# Altium PCB science_board_2019.PcbDoc
Units mm, origin at the board's own origin, x right, y up, seen from the top; angles counter-clockwise.
Board outline 88 x 100 mm, 2 copper layers (Top Layer, Bottom Layer); 100 components, 57 nets, 316 pads, 0 vias.
Unrouted connection lines stored in the file: 175.
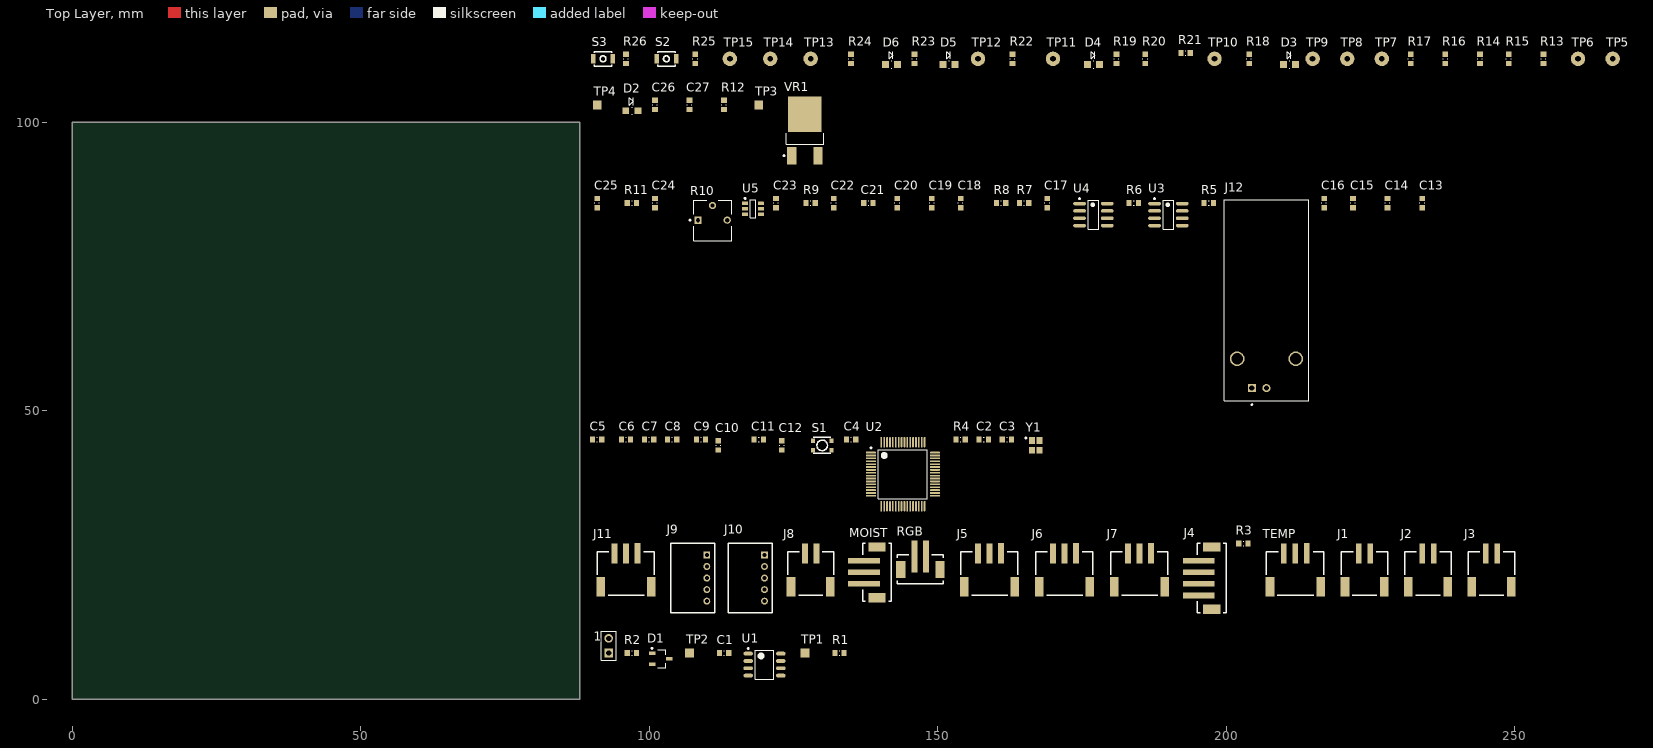
[diagram p0: Top Layer view]
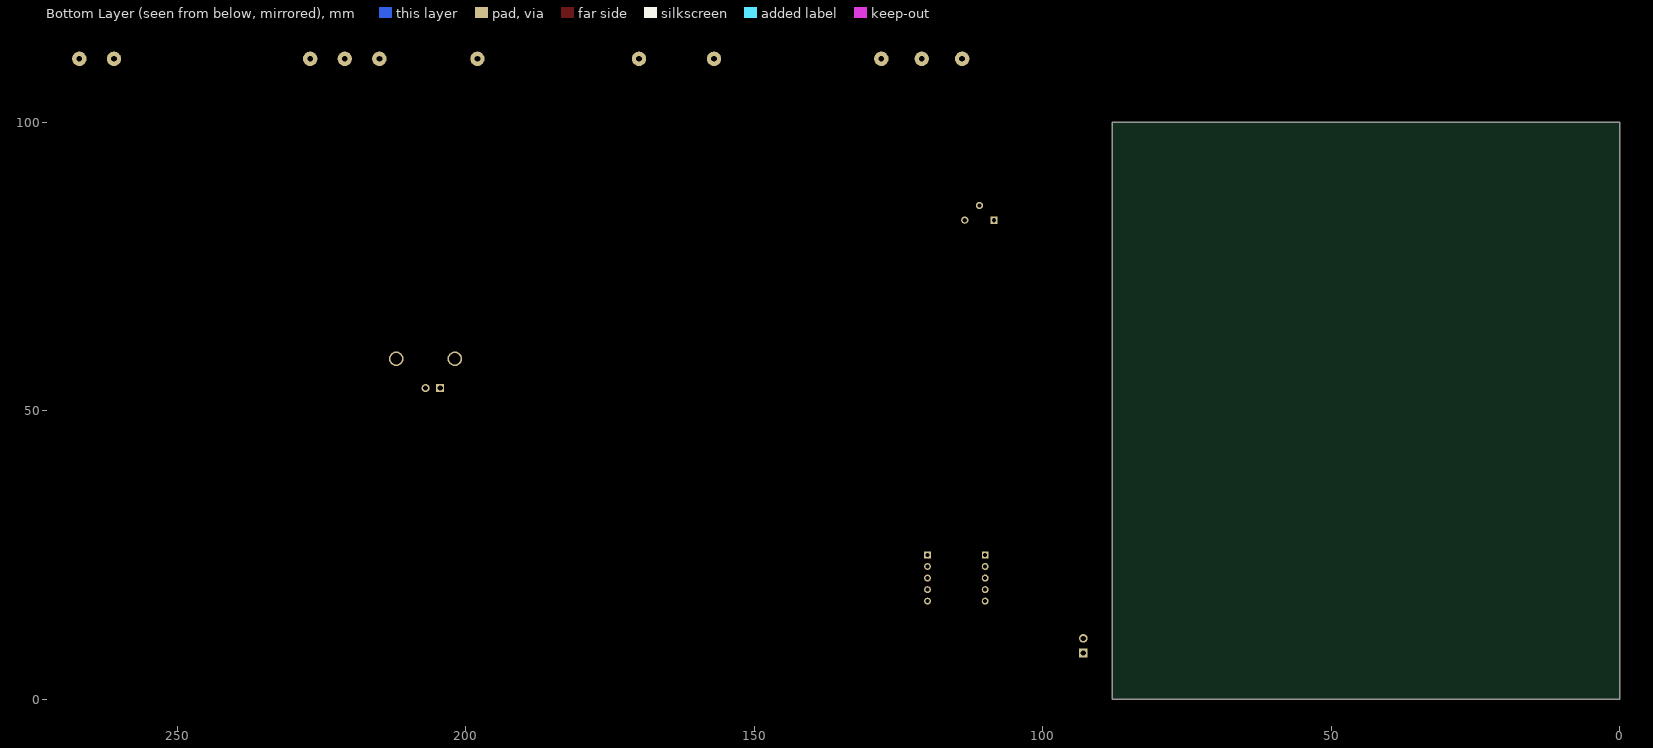
[diagram p1: Bottom Layer view, seen from below]

## Layer stack, top to bottom
Top Solder: solder mask 0.0102, Solder Resist, Dk 3.5
Top Layer: signal copper 0.0356
Dielectric 1: dielectric 0.32, FR-4, Dk 4.8
Bottom Layer: signal copper 0.0356
Bottom Solder: solder mask 0.0102, Solder Resist, Dk 3.5

## Board outline
0,0 0,100 88,100 88,0

## Design rules (kind name [scope] priority, off if disabled: settings)
Clearance [All] p1: gap=0.254 ignorepadtopadclearanceinfootprint=FALSE except(0: Arc-Hole Track-Hole SMDPad-Hole THPad-Hole Via-Hole Fill-Hole Poly-Hole Region-Hole Text-Hole)
PolygonConnect [All] p1: connectstyle=Relief reliefconductorwidth=0.254 reliefentries=4 polygonreliefangle="90 Angle" airgapwidth=0.254
RoomDefinition support [InComponentClass('support')] p1: confinementstyle=ConfineIn formatcopy=TRUE lockcomponents=FALSE outline 89,109 271,109 271,116 89,116
RoomDefinition power [InComponentClass('power')] p2: confinementstyle=ConfineIn formatcopy=TRUE lockcomponents=FALSE outline 90,92 131,92 131,108 90,108
RoomDefinition ph [InComponentClass('ph')] p3: confinementstyle=ConfineIn formatcopy=TRUE lockcomponents=FALSE outline 90,50 238,50 238,91 90,91
RoomDefinition mcu [InComponentClass('mcu')] p4: confinementstyle=ConfineIn formatcopy=TRUE lockcomponents=FALSE outline 89,32 169,32 169,49 89,49
RoomDefinition connectors [InComponentClass('connectors')] p5: confinementstyle=ConfineIn formatcopy=TRUE lockcomponents=FALSE outline 89,14 252,14 252,31 89,31
RoomDefinition can [InComponentClass('can')] p6: confinementstyle=ConfineIn formatcopy=TRUE lockcomponents=FALSE outline 89,2 135,2 135,13 89,13
RoutingVias [All] p1: holewidth=0.711 width=1.27 viastyle="Through Hole" minholewidth=0.711 minwidth=1.27 maxholewidth=0.711 maxwidth=1.27
SolderMaskExpansion [All] p1: expansion=0.102
Width [All] p1: maxlimit=0.254 minlimit=0.254 preferedwidth=0.254
30 further rules are at their usual default settings.

## Classes and differential pairs
component class support: D3 D4 D5 D6 R13 R14 R15 R16 R17 R18 R19 R20 R21 R22 R23 R24 R25 R26 S2 S3 TP5 TP6 TP7 TP8 TP9 TP10 TP11 TP12 TP13 TP14 TP15
component class power: C26 C27 D2 R12 TP3 TP4 VR1
component class ph: C13 C14 C15 C16 C17 C18 C19 C20 C21 C22 C23 C24 C25 J12 R5 R6 R7 R8 R9 R10 R11 U3 U4 U5
component class mcu: C2 C3 C4 C5 C6 C7 C8 C9 C10 C11 C12 R4 S1 U2 Y1
component class connectors: J1 J2 J3 J4 J5 J6 J7 J8 J9 J10 J11 MOIST R3 RGB TEMP
component class can: 1 C1 D1 R1 R2 TP1 TP2 U1

## Components (designator, comment, footprint, x,y, rotation, side; value= is the part's Value field where it differs from the comment)
1 "Header 2" HDR1X2 93,8 r90 top
C1 "CAP_0.1uF_16V_0603" CAPC0603(1608)55_N 113,8 r0 top value=0.1uF
C2 "CAP_15pF_0603" CAPC0603(1608)55_N 158,45 r0 top value=15pF
C3 "CAP_15pF_0603" CAPC0603(1608)55_N 162,45 r0 top value=15pF
C4 "CAP_0.1uF_16V_0603" CAPC0603(1608)55_N 135,45 r0 top value=0.1uF
C5 "CAP_0.1uF_16V_0603" CAPC0603(1608)55_N 91,45 r0 top value=0.1uF
C6 "CAP_0.1uF_16V_0603" CAPC0603(1608)55_N 96,45 r0 top value=0.1uF
C7 "CAP_0.1uF_16V_0603" CAPC0603(1608)55_N 100,45 r0 top value=0.1uF
C8 "CAP_4.7uF_0603" CAPC0603(1608)55_N 104,45 r0 top value=4.7uF
C9 "CAP_0.1uF_16V_0603" CAPC0603(1608)55_N 109,45 r0 top value=0.1uF
C10 "CAP_4.7uF_0603" CAPC0603(1608)55_N 112,44 r90 top value=4.7uF
C11 "CAP_10nF_0603" CAPC0603(1608)55_N 119,45 r0 top value=10nF
C12 "CAP_1uF_16V_0603" CAPC0603(1608)55_N 123,44 r90 top value=1uF
C13 "CAP_10uF_0603_POL" CAPC0603(1608)55_N 234,86 r90 top value=10uF
C14 "CAP_0.1uF_50V_0603" CAPC0603(1608)55_N 228,86 r90 top value=0.1uF
C15 "CAP_10uF_0603_POL" CAPC0603(1608)55_N 222,86 r90 top value=10uF
C16 "CAP_0.1uF_50V_0603" CAPC0603(1608)55_N 217,86 r90 top value=0.1uF
C17 "CAP_2.2nF_0603" CAPC0603(1608)55_N 169,86 r90 top value=2.2nF
C18 "CAP_0.1uF_50V_0603" CAPC0603(1608)55_N 154,86 r90 top value=0.1uF
C19 "CAP_10uF_0603_POL" CAPC0603(1608)55_N 149,86 r90 top value=10uF
C20 "CAP_1uF_16V_0603" CAPC0603(1608)55_N 143,86 r90 top value=1uF
C21 "CAP_10uF_0603_POL" CAPC0603(1608)55_N 138,86 r0 top value=10uF
C22 "CAP_0.1uF_50V_0603" CAPC0603(1608)55_N 132,86 r90 top value=0.1uF
C23 "CAP_1uF_16V_0603" CAPC0603(1608)55_N 122,86 r90 top value=1uF
C24 "CAP_1uF_16V_0603" CAPC0603(1608)55_N 101,86 r90 top value=1uF
C25 "CAP_1uF_16V_0603" CAPC0603(1608)55_N 91,86 r90 top value=1uF
C26 "CAP_0.33uF_16V_0603" CAPC0603(1608)55_N 101,103 r90 top value=0.33uF
C27 "CAP_10uF_0603" CAPC0603(1608)55_N 107,103 r90 top value=10uF
D1 "TVS_DIODE_CAN" TVS_DIODE_CAN 102,7 r0 top
D2 "DIO_LED_R" LED_0805 97,102 r0 top
D3 "DIO_LED_Y" LED_0805 211,110 r0 top
D4 "DIO_LED_G" LED_0805 177,110 r0 top
D5 "DIO_LED_G" LED_0805 152,110 r0 top
D6 "DIO_LED_G" LED_0805 142,110 r0 top
J1 "PH SIDE SMD" JST-S2B-SM4-TB 224,18 r0 top
J2 "PH SIDE SMD" JST-S2B-SM4-TB 235,18 r0 top
J3 "PH SIDE SMD" JST-S2B-SM4-TB 246,18 r0 top
J4 "PH TOP SMD" JST-B4B-SM4-TB 200,21 r90 top
J5 "PH SIDE SMD" JST-S3B-SM4-TB 159,18 r0 top
J6 "PH SIDE SMD" JST-S3B-SM4-TB 172,18 r0 top
J7 "PH SIDE SMD" JST-S3B-SM4-TB 185,18 r0 top
J8 "PH SIDE SMD" JST-S2B-SM4-TB 128,18 r0 top
J9 "PH SIDE TH" JST-S5B-PHSK 110,21 r90 top
J10 "PH SIDE TH" JST-S5B-PHSK 120,21 r90 top
J11 "PH SIDE SMD" JST-S3B-SM4-TB 96,18 r0 top
J12 "CON_BNC" 1-1337543-0 207,59 r0 top
MOIST "PH TOP SMD" JST-B3B-SM4-TB 142,22 r90 top
R1 "RES_0R_0603" RESC0603(1608)_N 133,8 r0 top value=0R
R2 "RES_120R_0603" RESC0603(1608)_N 97,8 r0 top value=120R
R3 "RES_4K7_0603" RESC0603(1608)_N 203,27 r0 top value=4K7
R4 "RES_0R_0603" RESC0603(1608)_N 154,45 r0 top value=0R
R5 "RES_4M7_0603" RESC0603(1608)_N 197,86 r0 top value=4.7M
R6 "RES_30K_0603" RESC0603(1608)_N 184,86 r0 top value=30K
R7 "RES_30K_0603" RESC0603(1608)_N 165,86 r0 top value=30K
R8 "RES_75K_0603" RESC0603(1608)_N 161,86 r0 top value=75K
R9 "RES_2K2_0603" RESC0603(1608)_N 128,86 r0 top value=2K2
R10 "POT_5K" 3362P-1-502LF 111,83 r0 top value=5K
R11 "RES_1K_0603" RESC0603(1608)_N 97,86 r0 top value=1K
R12 "RES_100R_0603" RESC0603(1608)_N 113,103 r90 top value=100R
R13 "RES_10K_0603" RESC0603(1608)_N 255,111 r90 top value=10K
R14 "RES_4K7_0603" RESC0603(1608)_N 244,111 r90 top value=4K7
R15 "RES_4K7_0603" RESC0603(1608)_N 249,111 r90 top value=4K7
R16 "RES_10K_0603" RESC0603(1608)_N 238,111 r90 top value=10K
R17 "RES_10K_0603" RESC0603(1608)_N 232,111 r90 top value=10K
R18 "RES_100R_0603" RESC0603(1608)_N 204,111 r90 top value=100R
R19 "RES_10K_0603" RESC0603(1608)_N 181,111 r90 top value=10K
R20 "RES_10K_0603" RESC0603(1608)_N 186,111 r90 top value=10K
R21 "RES_10K_0603" RESC0603(1608)_N 193,112 r0 top value=10K
R22 "RES_100R_0603" RESC0603(1608)_N 163,111 r90 top value=100R
R23 "RES_100R_0603" RESC0603(1608)_N 146,111 r90 top value=100R
R24 "RES_100R_0603" RESC0603(1608)_N 135,111 r90 top value=100R
R25 "RES_10K_0603" RESC0603(1608)_N 108,111 r90 top value=10K
R26 "RES_10K_0603" RESC0603(1608)_N 96,111 r90 top value=10K
RGB "PH TOP SMD" JST-B2B-SM4-TB 147,20 r0 top
S1 "SW_PWR" PTS830GM140 130,44 r0 top
S2 "SW_TACTILE" B3U-1100P 103,111 r0 top
S3 "SW_TACTILE" B3U-1100P 92,111 r0 top
TEMP "PH SIDE SMD" JST-S3B-SM4-TB 212,18 r0 top
TP1 "TESTPOINT_SMD" TESTPOINT 127,8 r0 top
TP2 "TESTPOINT_SMD" TESTPOINT 107,8 r90 top
TP3 "TESTPOINT_SMD" TESTPOINT 119,103 r90 top
TP4 "TESTPOINT_SMD" TESTPOINT 91,103 r90 top
TP5 "TESTPOINT_LOOP" TESTPOINT_LOOP 267,111 r0 top
TP6 "TESTPOINT_LOOP" TESTPOINT_LOOP 261,111 r0 top
TP7 "TESTPOINT_LOOP" TESTPOINT_LOOP 227,111 r0 top
TP8 "TESTPOINT_LOOP" TESTPOINT_LOOP 221,111 r0 top
TP9 "TESTPOINT_LOOP" TESTPOINT_LOOP 215,111 r0 top
TP10 "TESTPOINT_LOOP" TESTPOINT_LOOP 198,111 r90 top
TP11 "TESTPOINT_LOOP" TESTPOINT_LOOP 170,111 r90 top
TP12 "TESTPOINT_LOOP" TESTPOINT_LOOP 157,111 r90 top
TP13 "TESTPOINT_LOOP" TESTPOINT_LOOP 128,111 r90 top
TP14 "TESTPOINT_LOOP" TESTPOINT_LOOP 121,111 r90 top
TP15 "TESTPOINT_LOOP" TESTPOINT_LOOP 114,111 r90 top
U1 "IC TXRX CAN" LTC2875 120,6 r0 top
U2 "STM32F091RC" STM_LQFP64_N 144,39 r0 top
U3 "CA3140AMZ" CA3140AMZ 190,84 r0 top
U4 "TL081BCDG4" TL081BCDG4 177,84 r0 top
U5 "LM2776" SOT23-6 118,85 r0 top
VR1 "5V0_3V3_LDO" VOLTAGE_REGULATOR 127,97 r0 top
Y1 "CRYSTAL_32MHZ" AVX-CX2520DB32000D0GEJZ1-4_V 167,44 r0 top

## Footprints (in the part's own frame and the unit in brackets; to place one, negate y for a bottom-side part, rotate by r counter-clockwise, add the part's x,y. Pads: shape width x height; smd on the part's side, far side on the other; paste and mask are expansions set on the pad)
1-1337543-0 [mm]
  rect 1.4x1.4 hole 0.89: 1(-2.54,-5.08)
  round 1.4 hole 0.89: 2(0,-5.08)
  round 2.55 hole 2.01: MH1(-5.08,0) MH2(5.08,0)
  silkscreen extent -7.35,-8.07 7.35,27.6, body extent -7.35,-7.1 7.35,28.05, height 15.8
3362P-1-502LF [mm]
  rect 1.25x1.25 hole 0.75: 1(-2.54,0.035)
  round 1.25 hole 0.75: 2(0,2.575) 3(2.54,0.035)
  silkscreen extent -4.02,-3.49 3.3,3.5, body extent -3.3,-3.49 3.3,3.49, height 4.95
AVX-CX2520DB32000D0GEJZ1-4_V [mm] "Hand Drawn, 4-Leads,Body 2.5x2mm"
  rect 1x1.2 smd: 1(-0.65,0.85) 2(-0.65,-0.85) 3(0.65,-0.85) 4(0.65,0.85)
  silkscreen extent -1.82,1.13 -1.58,1.38, body extent -1,-1.25 1,1.25, height 0.55
B3U-1100P [mm] "TACTILE SWITCH GREY"
  rect 0.8x1.7 smd: 1(-1.7,0) 2(1.7,0)
  silkscreen extent -1.5,-1.25 1.5,1.25
CA3140AMZ [mm]
  oval 2.2x0.6 smd: 1(-2.4,1.905) 2(-2.4,0.635) 3(-2.4,-0.635) 4(-2.4,-1.905) 5(2.4,-1.905) 6(2.4,-0.635) 7(2.4,0.635) 8(2.4,1.905)
  silkscreen extent -2.52,-2.5 0.9,2.88, body extent -2,-2.5 2,2.5, height 1.75
CAPC0603(1608)55_N [mm] "Chip Capacitor, Body 1.6x0.8mm, Height 0.55mm, IPC Medium Density"
  rect 0.9x1 smd: 1(-0.8,0) 2(0.8,0)
  silkscreen extent -0.05,-0.4 0.05,0.4, body extent -0.87,-0.48 0.88,0.47, height 0.55
HDR1X2 [mm] "Connector; Header; 2 Position"
  rect 1.5x1.5 hole 0.9: 1(0,0)
  round 1.5 hole 0.9: 2(2.54,0)
  silkscreen extent -1.27,-1.27 3.81,1.27
JST-B2B-SM4-TB [mm]
  rect 1x5.5 smd: 1(-1,4.75) 2(1,4.75)
  rect 1.6x3 smd: 3(-3.4,2.5) 4(3.4,2.5)
  silkscreen extent -4,0 4,5
JST-B3B-SM4-TB [mm]
  rect 1x5.5 smd: 1(-2,4.75) 2(0,4.75) 3(2,4.75)
  rect 1.6x3 smd: 4(-4.4,2.5) 5(4.4,2.5)
  silkscreen extent -5,0 5,5
JST-B4B-SM4-TB [mm]
  rect 1x5.5 smd: 1(-3,4.75) 2(-1,4.75) 3(1,4.75) 4(3,4.75)
  rect 1.6x3 smd: 5(-5.4,2.5) 6(5.4,2.5)
  silkscreen extent -6,0 6,5
JST-S2B-SM4-TB [mm]
  rect 1x3.5 smd: 1(-1,7.25) 2(1,7.25)
  rect 1.5x3.4 smd: 3(-3.4,1.5) 4(3.4,1.5)
  silkscreen extent -4,0 4,7.6
JST-S3B-SM4-TB [mm]
  rect 1x3.5 smd: 1(-2,7.25) 2(0,7.25) 3(2,7.3)
  rect 1.5x3.4 smd: 4(-4.4,1.5) 5(4.4,1.5)
  silkscreen extent -5,0 4.9,7.6
JST-S5B-PHSK [mm]
  rect 1.162x1.162 / inner rect 1.524x1.524 / far side rect 1.162x1.162 hole 0.7: 1(4,0)
  round 1.2 / inner round 1.524 / far side round 1.2 hole 0.7: 2(2,0) 3(0,0) 4(-2,0) 5(-4,0)
  silkscreen extent -6,-1.35 6,6.25
LED_0805 [mm] "SMD, 2-Leads, Body 2x1.25mm"
  rect 1.2x1.2 smd: 1(-1.05,0) 2(1.05,0)
  silkscreen extent -0.41,-0.63 0.23,2.25, body extent -1,-0.63 1,0.63, height 0.8
LTC2875 [mm] "SOIC, 8-Leads, Body 5x4mm, Pitch 1.27mm, IPC Low Density"
  oval 1.65x0.65 smd: 1(-2.825,1.905) 2(-2.825,0.635) 3(-2.825,-0.635) 4(-2.825,-1.905) 5(2.825,-1.905) 6(2.825,-0.635) 7(2.825,0.635) 8(2.825,1.905)
  silkscreen extent -2.95,-2.5 1.6,2.9, body extent -3,-2.5 3,2.5, height 1.75
PTS830GM140 [mm] "PWR TACTILE SWITCH (RED)"
  rect 0.7x0.75 smd: 1(-1.625,0.825) 2(1.625,0.825) 3(-1.625,-0.825) 4(1.625,-0.825)
  silkscreen extent -1.53,-1.4 1.53,1.4
RESC0603(1608)_N [mm] "Chip Resistor, Body 1.6x0.8mm, IPC Medium Density"
  rect 0.9x1 smd: 1(-0.8,0) 2(0.8,0)
  silkscreen extent -0.05,-0.4 0.05,0.4, body extent -0.85,-0.47 0.85,0.47, height 0.6
SOT23-6 [mm] "SOT23, 6-Leads, Body 3.05x1.75mm, Pitch 0.95mm, IPC Medium Density"
  rrect17% 1x0.6 smd: 1(-1.375,0.95) 2(-1.375,0) 3(-1.375,-0.95) 4(1.375,-0.95) 5(1.375,0) 6(1.375,0.95)
  silkscreen extent -1.5,-1.55 0.5,1.92, body extent -1.43,-1.48 1.43,1.49, height 0.9
STM_LQFP64_N [mm] "Thin QFP, 64-Leads, Body 10x10mm, Pitch 0.5mm, IPC Medium Density"
  oval 1.8x0.3 smd mask+0.05: 1(-5.55,3.75) 2(-5.55,3.25) 3(-5.55,2.75) 4(-5.55,2.25) 5(-5.55,1.75) 6(-5.55,1.25) 7(-5.55,0.75) 8(-5.55,0.25) 9(-5.55,-0.25) 10(-5.55,-0.75) 11(-5.55,-1.25) 12(-5.55,-1.75) 13(-5.55,-2.25) 14(-5.55,-2.75) 15(-5.55,-3.25) 16(-5.55,-3.75) 33(5.55,-3.75) 34(5.55,-3.25) 35(5.55,-2.75) 36(5.55,-2.25) 37(5.55,-1.75) 38(5.55,-1.25) 39(5.55,-0.75) 40(5.55,-0.25) 41(5.55,0.25) 42(5.55,0.75) 43(5.55,1.25) 44(5.55,1.75) 45(5.55,2.25) 46(5.55,2.75) 47(5.55,3.25) 48(5.55,3.75)
  oval 0.3x1.8 smd mask+0.05: 17(-3.75,-5.55) 18(-3.25,-5.55) 19(-2.75,-5.55) 20(-2.25,-5.55) 21(-1.75,-5.55) 22(-1.25,-5.55) 23(-0.75,-5.55) 24(-0.25,-5.55) 25(0.25,-5.55) 26(0.75,-5.55) 27(1.25,-5.55) 28(1.75,-5.55) 29(2.25,-5.55) 30(2.75,-5.55) 31(3.25,-5.55) 32(3.75,-5.55) 49(3.75,5.55) 50(3.25,5.55) 51(2.75,5.55) 52(2.25,5.55) 53(1.75,5.55) 54(1.25,5.55) 55(0.75,5.55) 56(0.25,5.55) 57(-0.25,5.55) 58(-0.75,5.55) 59(-1.25,5.55) 60(-1.75,5.55) 61(-2.25,5.55) 62(-2.75,5.55) 63(-3.25,5.55) 64(-3.75,5.55)
  silkscreen extent -5.67,-4.25 4.25,4.7, body extent -5,-5 5,5, height 1.6
TESTPOINT [mil]
  rect 60x60 smd: 1(0,0)
TESTPOINT_LOOP [mm]
  round 2.5 hole 1: 2(0,0)
TL081BCDG4 [mm]
  oval 2.2x0.6 smd: 1(-2.4,1.905) 2(-2.4,0.635) 3(-2.4,-0.635) 4(-2.4,-1.905) 5(2.4,-1.905) 6(2.4,-0.635) 7(2.4,0.635) 8(2.4,1.905)
  silkscreen extent -2.52,-2.5 0.9,2.88, body extent -2,-2.5 2,2.5, height 1.75
TVS_DIODE_CAN [mm] "SOT23, 3-Leads, Body 2.95x2.80mm, Pitch 0.95mm, IPC Low Density"
  rect 1.15x0.65 smd: 1(-1.475,0.95) 2(-1.475,-0.95) 3(1.475,0)
  silkscreen extent -1.6,-1.55 0.9,1.95, body extent -1.5,-1.55 1.5,1.55, height 1.25
VOLTAGE_REGULATOR [mm] "DPAK, 3-Leads, Body 6.095x6.54mm, Pitch 4.57mm"
  rect 1.6x3 smd: 1(-2.285,-2.79) 3(2.285,-2.79)
  rect 5.8x6.2 smd: 2(0,4.39)
  silkscreen extent -3.76,-2.91 3.27,1.14, body extent -3.27,-0.84 3.27,5.25, height 2.38

## Part data
1: "Header, 2-Pin", LatestRevisionDate=17-Jul-2002, LatestRevisionNote="Re-released for DXP Platform.", Publisher="Altium Limited"
C1 C4 C5 C6 C7 C9: "CAP CER 0.1UF 16V X7R 0603", Manufacturer=Yageo, Package="0603 (1608 Metric)", Part Number=CC0603KRX7R7BB104, Temperature Coefficient=X7R, Voltage Rating=16V, Dimensions="0.063\" L x 0.031\" W (1.60mm x 0.80mm)"
C2 C3: "CAP CER 15PF 250V NPO 0603", Manufacturer=Yageo, Package="0603 (1608 Metric)", Part Number=AC0603JRNPOYBN150, Temperature Coefficient=NP0, Voltage Rating=250v, Dimensions="0.063\" L x 0.031\" W (1.60mm x 0.80mm)"
C8 C10: "CAP CER 4.7UF 6.3V X5R 0603", Manufacturer=Yageo, Package="0603 (1608 Metric)", Part Number=CC0603KRX5R5BB475, Temperature Coefficient=X5R, Voltage Rating=6.3V, Dimensions="0.063\" L x 0.031\" W (1.60mm x 0.80mm)"
C11: "CAP CER 10000PF 16V X7R 0603", Manufacturer=Yageo, Package="0603 (1608 Metric)", Part Number=CC0603KRX7R7BB103, Temperature Coefficient=X7R, Voltage Rating=16V, Dimensions="0.063\" L x 0.031\" W (1.60mm x 0.80mm)"
C12 C20 C23 C24 C25: "CAP CER 1UF 16V Y5V 0603", Manufacturer=Yageo, Package="0603 (1608 Metric)", Part Number=CC0603ZRY5V7BB105, Temperature Coefficient=Y5V, Voltage Rating=16V, Dimensions="0.063\" L x 0.031\" W (1.60mm x 0.80mm)"
C13 C15 C19 C21 C27: "CAP CER 10UF 10V X5R 0603", Manufacturer=Yageo, Package="0603 (1608 Metric)", Part Number=CC0603MRX5R6BB106, Temperature Coefficient=X5R, Voltage Rating=10V, Dimensions="0.063\" L x 0.031\" W (1.60mm x 0.80mm)"
C14 C16 C18 C22: "CAP CER 0.1UF 50V X7R 0603", Manufacturer=Yageo, Package="0603 (1608 Metric)", Part Number=GCM188R71H104KA57D, Temperature Coefficient=X7R, Voltage Rating=50V, Dimensions="0.063\" L x 0.031\" W (1.60mm x 0.80mm)"
C17: "CAP CER 2.2NF 25V X7R 0603", Manufacturer=Yageo, Package="0603 (1608 Metric)", Part Number=CC0603KRX7R8BB222, Temperature Coefficient=X7R, Voltage Rating=25V, Dimensions="0.063\" L x 0.031\" W (1.60mm x 0.80mm)"
C26: "CAP CER 0.33UF 16V X7R 0603", Manufacturer="Murata Electronics North America", Package="0603 (1608 Metric)", Part Number=GRM188R71C334KA01D, Temperature Coefficient=X7R, Voltage Rating=16V, Dimensions="0.063\" L x 0.031\" W (1.60mm x 0.80mm)"
D1: "TVS DIODE 24V 41V SOT323-3", Manufacturer="Nexperia USA Inc.", Package="SC-70, SOT-323", Part Number=PESD2CAN,215, ComponentLink1Description=Datasheet, ComponentLink1URL=https://assets.nexperia.com/documents/data-sheet/PESD1CAN-U.pdf
D2: "LED RED DIFFUSED 0805 SMD", Forward Voltage Drop=2V, Manufacturer=OSRAM, Package="0805 (2012 Metric)", Part Number="LS R976-NR-1"
D3: "LED YELLOW DIFFUSED 0805 SMD", Forward Voltage Drop=2.2V, Manufacturer=OSRAM, Package="0805 (2012 Metric)", Part Number="LY R976-PS-36"
D4 D5 D6: "LED GREEN DIFFUSED 0805 SMD", Forward Voltage Drop=2.2V, Manufacturer=OSRAM, Package="0805 (2012 Metric)", Part Number="LG R971-KN-1"
J1 J2 J3 J8: library part CON_2M_PH_SIDE_SMT, "CONN HEADER PH SIDE 2POS 2MM SMD", Manufacturer=JST, Part Number=S2B-PH-SM4-TB, ComponentLink1Description=Datasheet, ComponentLink1URL=http://www.jst-mfg.com/product/pdf/eng/ePH.pdf
J4: library part CON_4M_PH_TOP_SMT, "CONN HEADER PH TOP 4POS 2MM SMD", Manufacturer=JST, Part Number=B4B-PH-SM4-TB, ComponentLink1Description=Datasheet, ComponentLink1URL=http://www.jst-mfg.com/product/pdf/eng/ePH.pdf
J5 J6 J7 J11 TEMP: library part CON_3M_PH_SIDE_SMT, "CONN HEADER PH SIDE 3POS 2MM SMD", Manufacturer=JST, Part Number=B3B-PH-SM4-TB, ComponentLink1Description=Datasheet, ComponentLink1URL=http://www.jst-mfg.com/product/pdf/eng/ePH.pdf
J9 J10: library part CON_5M_PH_SIDE_TH, "CONN HEADER PH SIDE 5POS 2MM", Manufacturer=JST, Part Number=S5B-PH-K-S, ComponentLink1Description=Datasheet, ComponentLink1URL=http://www.jst-mfg.com/product/pdf/eng/ePH.pdf
J12: Manufacturer="TE Connectivity", Part Number (MPN)=1-1337543-0
MOIST: library part CON_3M_PH_TOP_SMT, "CONN HEADER PH TOP 3POS 2MM SMD", Manufacturer=JST, Part Number=B3B-PH-SM4-TB, ComponentLink1Description=Datasheet, ComponentLink1URL=http://www.jst-mfg.com/product/pdf/eng/ePH.pdf
R1 R4: "RES SMD 0 OHM JUMPER 1/10W 0603", Manufacturer=Yageo, Package="0603 (1608 Metric)", Part Number (MPN)=RC0603JR-070RL, Dimensions="0.063\" L x 0.031\" W (1.60mm x 0.80mm)"
R2: "RES SMD 120 OHM 5% 1/10W 0603", Manufacturer=Yageo, Package="0603 (1608 Metric)", Part Number (MPN)=RC0603JR-07120RL, Tolerance=5%, Dimensions="0.063\" L x 0.031\" W (1.60mm x 0.80mm)"
R3 R14 R15: "RES SMD 4.7K OHM 5% 1/10W 0603", Manufacturer=Yageo, Package="0603 (1608 Metric)", Part Number (MPN)=RC0603JR-074K7L, Tolerance=5%, Dimensions="0.063\" L x 0.031\" W (1.60mm x 0.80mm)"
R5: "RES SMD 4.7M OHM 1% 1/10W 0603", Manufacturer=Yageo, Package="0603 (1608 Metric)", Part Number (MPN)=RC0603FR-074M7L, Tolerance=1%, Dimensions="0.063\" L x 0.031\" W (1.60mm x 0.80mm)"
R6 R7: "RES SMD 30K OHM 0.5% 1/10W 0603", Digikey Part Number=311-30KDCT-ND, Manufacturer=Yageo, Package="0603 (1608 Metric)", Part Number (MPN)=RT0603DRD0730KL, Tolerance=0.5%, Dimensions="0.063\" L x 0.031\" W (1.60mm x 0.80mm)"
R8: "RES SMD 75K OHM 0.5% 1/10W 0603", Digikey Part Number=311-75KDCT-ND, Manufacturer=Yageo, Package="0603 (1608 Metric)", Part Number (MPN)=RT0603DRD0775KL, Tolerance=0.5%, Dimensions="0.063\" L x 0.031\" W (1.60mm x 0.80mm)"
R9: "RES SMD 2.2K OHM 1% 1/10W 0603", Manufacturer=Yageo, Package="0603 (1608 Metric)", Part Number (MPN)=RC0603FR-072K2L, Tolerance=1%, Dimensions="0.063\" L x 0.031\" W (1.60mm x 0.80mm)"
R10: "TRIMMER 5K OHM 0.5W PC PIN TOP", Manufacturer="Bourns Inc.", Part Number (MPN)=3362P-1-502LF, Tolerance=10%, Dimensions="0.275\" x 0.260\" Face x 0.185\" H (6.99mm x 6.60mm x 4.70mm)"
R11: "RES SMD 1K OHM 5% 1/10W 0603", Manufacturer=Yageo, Package="0603 (1608 Metric)", Part Number (MPN)=RC0603JR-071KL, Tolerance=5%, Dimensions="0.063\" L x 0.031\" W (1.60mm x 0.80mm)"
R12 R18 R22 R23 R24: "RES SMD 100 OHM 1% 1/10W 0603", Manufacturer=Yageo, Package="0603 (1608 Metric)", Part Number (MPN)=RC0603FR-07100RL, Tolerance=1%, Dimensions="0.063\" L x 0.031\" W (1.60mm x 0.80mm)"
R13 R16 R17 R19 R20 R21 R25 R26: "RES SMD 10K OHM 5% 1/10W 0603", Manufacturer=Yageo, Package="0603 (1608 Metric)", Part Number (MPN)=RC0603JR-0710KL, Tolerance=5%, Dimensions="0.063\" L x 0.031\" W (1.60mm x 0.80mm)"
RGB: library part CON_2M_PH_TOP_SMT, "CONN HEADER PH TOP 2POS 2MM SMD", Manufacturer=JST, Part Number=B2B-PH-SM4-TB, ComponentLink1Description=Datasheet, ComponentLink1URL=http://www.jst-mfg.com/product/pdf/eng/ePH.pdf
S1: "Power Switch (Red)", Part Number="PTS830GM140 SMTR LFS", ComponentLink1Description=Datasheet, ComponentLink1URL=https://www.ckswitches.com/media/1478/pts830.pdf
S2 S3: "Tactile Switch (Grey)", Digikey Part Number=SW1021TR-ND, Manufacturer Part Number=B3U-1100P
U1: library part LTC2875, "IC TXRX CAN 4MBPS 8SO", Manufacturer="Linear Technologies", Package="8-SOIC (0.154\", 3.90mm Width)", Part Number=LTC2875IS8#PBF, ComponentLink1Description=Datasheet, ComponentLink1URL=https://www.analog.com/media/en/technical-documentation/data-sheets/2875f.pdf
U2: Manufacturer=STMicroelectronics, Package=64-LQFP, ComponentLink1Description=Datasheet, ComponentLink1URL=https://www.st.com/content/ccc/resource/technical/document/datasheet/95/3c/2e/5b/21/09/45/a6/DM00115237.pdf/files/DM00115237.pdf/jcr:content/translations/en.DM00115237.pdf#%5B%7B%22num%22%3A96%2C%22gen%22%3A0%7D%2C%7B%22name%22%3A%22XYZ%22%7D%2C67%2C755%2Cnull%5D, Part Number=STM32F091RC
U3: "4.5MHz, BiMOS Operational Amplifier with MOSFET Input/Bipolar Output"
U4: "IC OPAMP JFET 3MHZ 8SOIC"
U5: "LM2776 Switched Capacitor Inverter"
VR1: "IC REG LINEAR 3.3V 1A DPAK", Current Output=1A, Manufacturer="ON Semiconductor", Part Number=NCP1117DT33T5G
Y1: "CRYSTAL 32MHZ 8PF SMD", Manufacturer="Kyocera International Inc. Electronic Components", Package="4-SMD, No Lead", Part Number=CX2520DB32000D0GPSC1, Dimensions="0.098\" L x 0.079\" W (2.50mm x 2.00mm)"

## Nets (pads, with @x,y where several pads share a name; then routed paths per layer and width w, separated by ;. In a path a pad name is that pad's centre, name@x,y a point inside that pad or via, vN(x,y) a via of type N, cw(c..) or ccw(c..) an arc to the next point about the centre after c; other vN are vias at no path point)
+3V3: C1.2 C5.1 C6.1 C7.1 C8.2 C9.1 C10.2 C11.2 C12.2 C27.2 J9.4 J10.4 R3.2 R12.2 R14.2 R15.2 R19.2 R20.2 R21.2 R25.2 R26.1 TEMP.3 TP3.1 U1.3 U2.1 U2.13 U2.19 U2.32 U2.48 U2.64 VR1.2
+5V: C13.1 C14.2 C15.1 C16.2 C25.2 J4.1 U5.3
+5V0: C26.2 J8.1 VR1.3
-5V: C18.2 C19.2 C21.2 C22.2 R8.1 U5.1
CAN_H: D1.1 J11.1 R2.1 TP1.1 U1.7
CAN_L: 1.1 D1.2 J11.2 TP2.1 U1.6
GND: C1.1 C2.1 C3.1 C4.1 C5.2 C6.2 C7.2 C8.1 C9.2 C10.1 C11.1 C12.1 C13.2 C14.1 C15.2 C16.1 C17.1 C18.1 C19.1 C21.1 C22.1 C23.2 C25.1 C26.1 C27.1 D1.3 D2.2 D3.2 D4.2 D5.2 D6.2 J1.2 J2.2 J3.2 J4.4 J5.3 J6.3 J7.3 J8.2 J9.5 J10.5 J11.3 J12.2 MOIST.3 R1.2 R11.1 R13.1 R16.1 R17.1 S1.1 S2.2 S3.2 TEMP.1 TP4.1 U1.2 U2.12 U2.18 U2.31 U2.47 U2.63 U5.2 VR1.1 Y1.2
Net1_2: 1.2 R2.2
NetC2_2: C2.2 R4.2 Y1.1
NetC3_2: C3.2 U2.5 Y1.3
NetC20_1: C20.1 R10.3
NetC20_2: C20.2 R7.1 R9.2
NetC24_1: C24.1 U5.5
NetC24_2: C24.2 U5.6
NetD2_1: D2.1 R12.1
NetD3_1: D3.1 R18.2
NetD4_1: D4.1 R22.2
NetD5_1: D5.1 R23.2
NetD6_1: D6.1 R24.2
NetJ1_1: J1.1 R19.1 U2.41
NetJ2_1: J2.1 R20.1 U2.44
NetJ3_1: J3.1 R21.1 U2.45
NetJ4_2: J4.2
NetJ4_3: J4.3
NetJ5_1: J5.1 R13.2 U2.38
NetJ5_2: J5.2 U2.39
NetJ6_1: J6.1 R16.2 U2.36
NetJ6_2: J6.2 U2.37
NetJ7_1: J7.1 R17.2 U2.34
NetJ7_2: J7.2 U2.35
NetJ9_1: J9.1 U2.51
NetJ9_2: J9.2 U2.52
NetJ9_3: J9.3 U2.54
NetJ10_1: J10.1 U2.46
NetJ10_2: J10.2 U2.49
NetMOIST_1: MOIST.1 U2.17
NetMOIST_2: MOIST.2 U2.20
NetR1_1: R1.1 U1.8
NetR3_1: R3.1 TEMP.2
NetR4_1: R4.1 U2.6
NetR6_1: R6.1 R7.2 R8.2
NetR6_2: R6.2 U2.23
NetR9_1: R9.1 R10.1
NetR10_2: R10.2 R11.2
NetR14_1: R14.1 RGB.1 U2.58
NetR15_1: R15.1 RGB.2 U2.59
NetR18_1: R18.1 U2.8
NetR22_1: R22.1 U2.9
NetR23_1: R23.1 U2.10
NetR24_1: R24.1 U2.11
NetR25_1: R25.1 S2.1 U2.14
NetR26_2: R26.2 S3.1 U2.15
NetU1_1: U1.1 U2.62
NetU1_4: U1.4 U2.61
NetU2_22: U2.22
NetU5_4: U5.4
R\S\T\: C4.2 J10.3 S1.4 U2.7
pads on no net: C17.2 C23.1 J1.3 J1.4 J2.3 J2.4 J3.3 J3.4 J4.5 J4.6 J5.4 J5.5 J6.4 J6.5 J7.4 J7.5 J8.3 J8.4 J11.4 J11.5 J12.1 J12.MH1 J12.MH2 MOIST.4 MOIST.5 R5.1 R5.2 RGB.3 RGB.4 S1.2 S1.3 TEMP.4 TEMP.5 TP5.2 TP6.2 TP7.2 TP8.2 TP9.2 TP10.2 TP11.2 TP12.2 TP13.2 TP14.2 TP15.2 U1.5 U2.2 U2.3 U2.4 U2.16 U2.21 U2.24 U2.25 U2.26 U2.27 U2.28 U2.29 U2.30 U2.33 U2.40 U2.42 U2.43 U2.50 U2.53 U2.55 U2.56 U2.57 U2.60 U3.1 U3.2 U3.3 U3.4 U3.5 U3.6 U3.7 U3.8 U4.1 U4.2 U4.3 U4.4 U4.5 U4.6 U4.7 U4.8 Y1.4

## Text inside footprints (layer, text, board x,y; h text height)
J1: Mechanical 1 "BOARD EDGE" at 221.4,17 h0.51
J2: Mechanical 1 "BOARD EDGE" at 232.4,17 h0.51
J3: Mechanical 1 "BOARD EDGE" at 243.4,17 h0.51
J5: Mechanical 1 "BOARD EDGE" at 156.7,16.9 h0.51
J6: Mechanical 1 "BOARD EDGE" at 169.7,16.9 h0.51
J7: Mechanical 1 "BOARD EDGE" at 182.7,16.9 h0.51
J8: Mechanical 1 "BOARD EDGE" at 125.4,17 h0.51
J9: Mechanical 1 "BOARD EDGE" at 103.4,18.3 h0.51 r90
J10: Mechanical 1 "BOARD EDGE" at 113.4,18.3 h0.51 r90
J11: Mechanical 1 "BOARD EDGE" at 93.7,16.9 h0.51
TEMP: Mechanical 1 "BOARD EDGE" at 209.7,16.9 h0.51